# Altium PCB TwelfthManPCB.PcbDoc
Units mil, origin at the board's own origin, x right, y up, seen from the top; angles counter-clockwise.
Board outline 3200 x 2000 mil, 2 copper layers (Top Layer, Bottom Layer); 27 components, 17 nets, 118 pads, 38 vias.
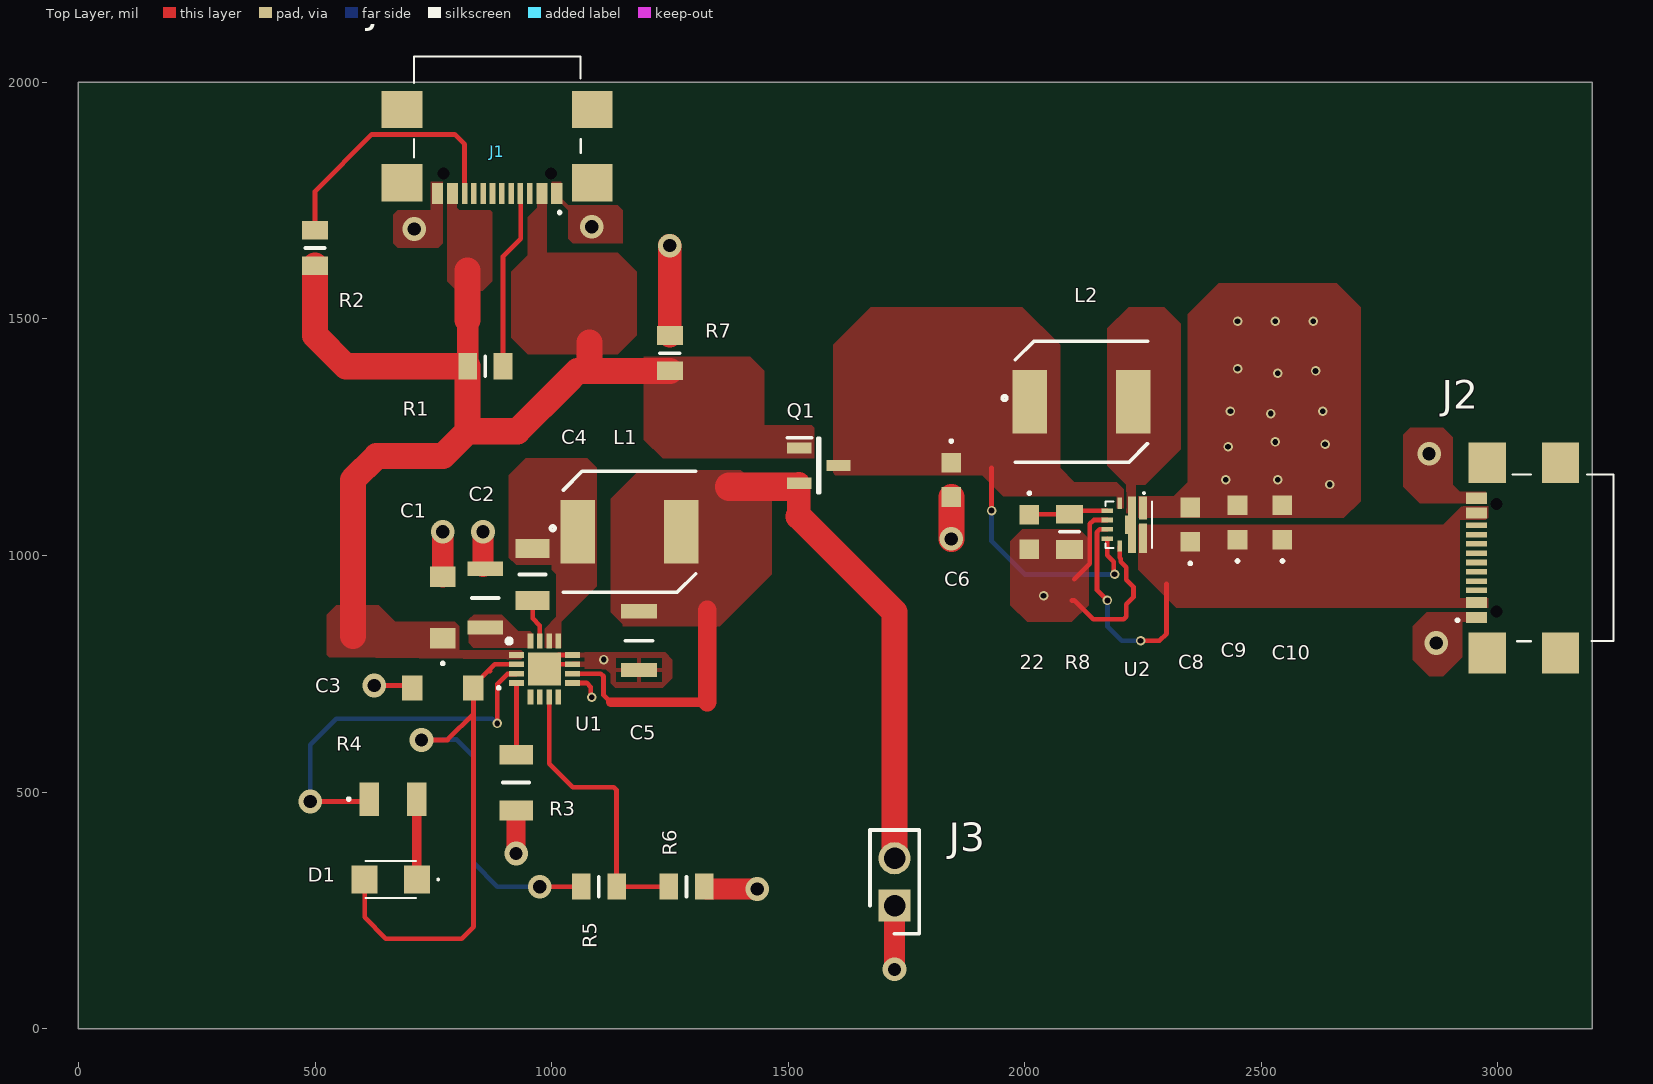
[diagram p0: Top Layer view]
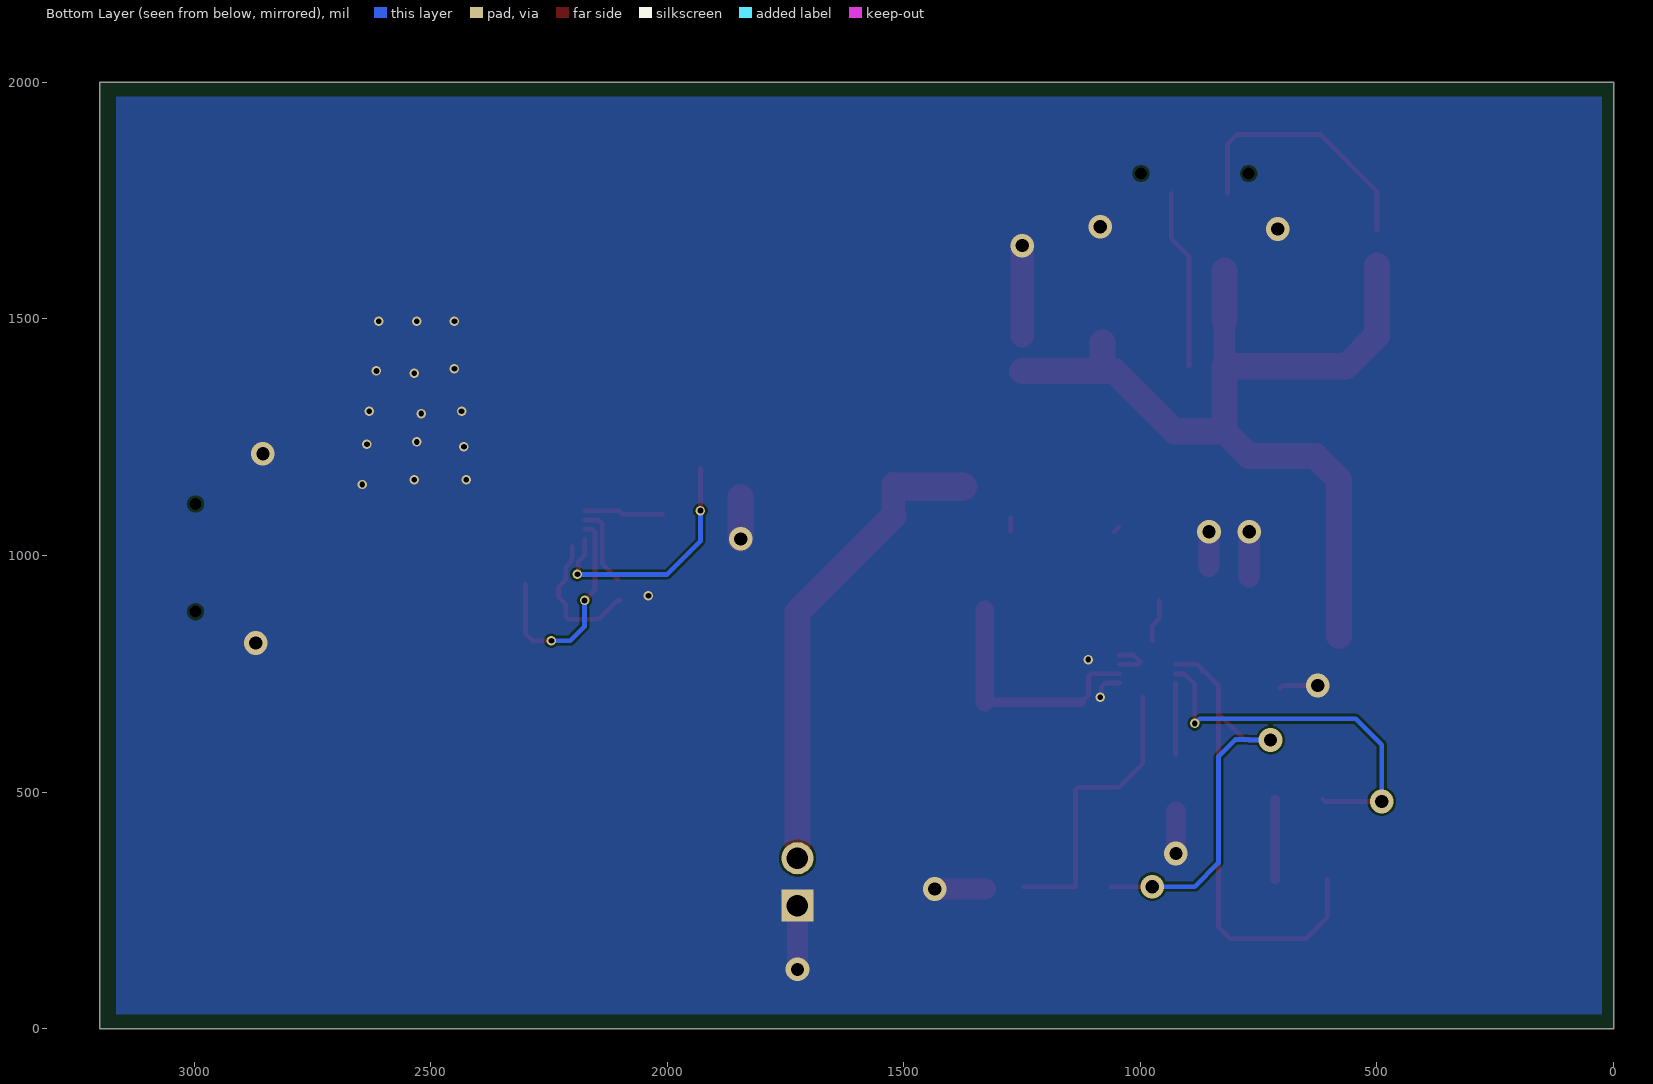
[diagram p1: Bottom Layer view, seen from below]
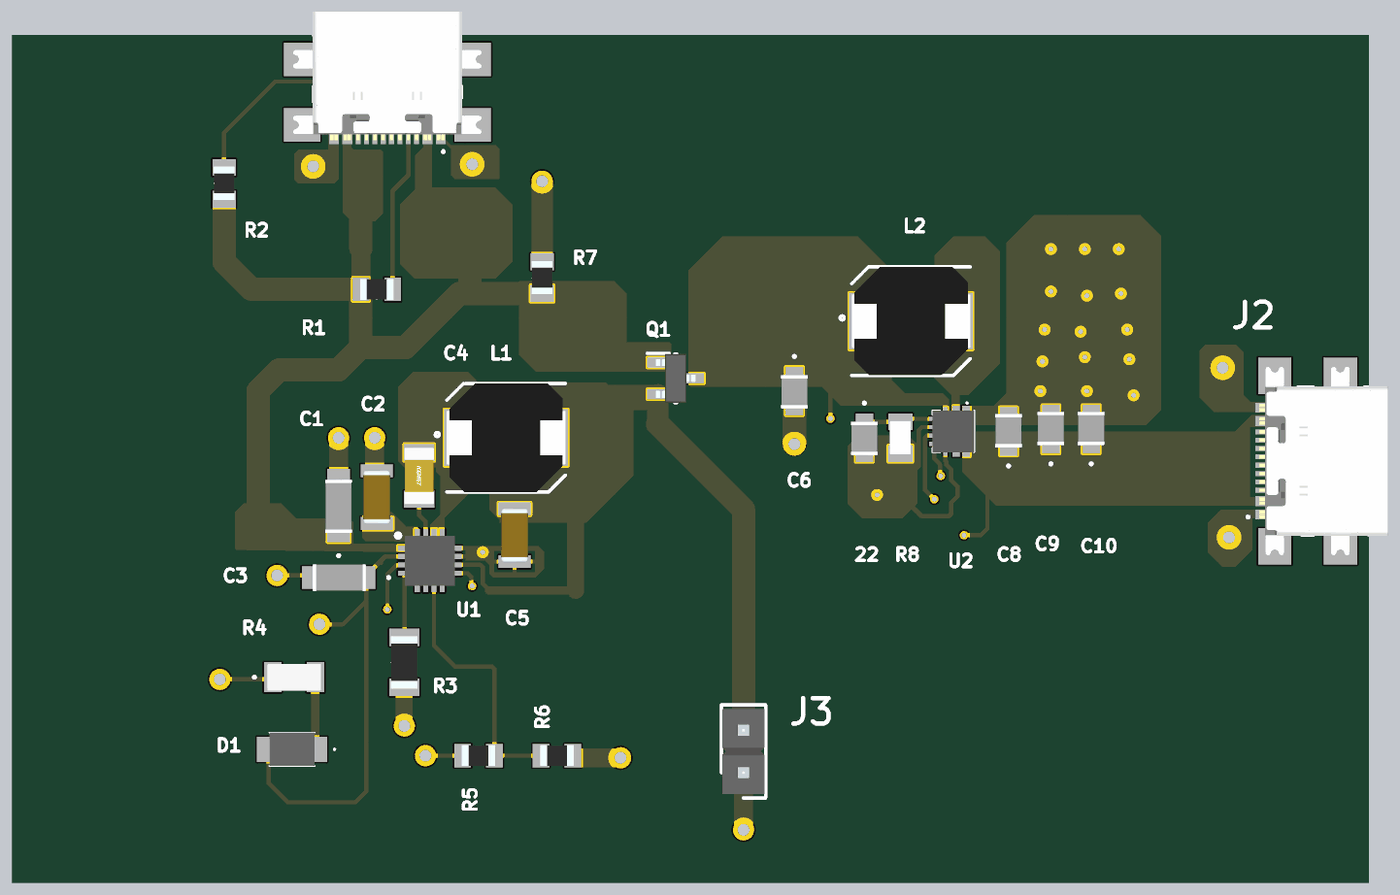
[diagram p2: 3D render of the assembled board from above, using the file's embedded part models]

## Layer stack, top to bottom
Top Solder: solder mask 0.4, Solder Resist, Dk 3.5
Top Layer: signal copper 1.4
Dielectric 1: dielectric 12.6, FR-4, Dk 4.8
Bottom Layer: signal copper 1.4
Bottom Solder: solder mask 0.4, Solder Resist, Dk 3.5

## Board outline
0,0 3200,0 3200,2000 0,2000

## Design rules (kind name [scope] priority, off if disabled: settings)
Clearance [All] p1: gap=5 ignorepadtopadclearanceinfootprint=TRUE
MinimumSolderMaskSliver [All] p1: minsoldermaskwidth=0.25
PolygonConnect [All] p1: connectstyle=Direct reliefconductorwidth=10 reliefentries=4 polygonreliefangle="90 Angle" airgapwidth=10
RoutingVias [All] p1: holewidth=12 width=20 viastyle="Through Hole" minholewidth=12 minwidth=20 maxholewidth=28 maxwidth=50
SilkToSilkClearance [All] p1: silktosilkclearance=1.97
SilkToSolderMaskClearance [IsPad] p1: minsilkscreentomaskgap=2.54 clearancetoexposedcopper=TRUE
SolderMaskExpansion [All] p1: expansion=4 istentingtop=FALSE
Width [All] p1: maxlimit=60 minlimit=10 preferedwidth=10 minimp=50.000000 maximp=50.000000 favimp=50.000000
27 further rules are at their usual default settings.

## Components (designator, comment, footprint, x,y, rotation, side; value= is the part's Value field where it differs from the comment)
22 "10nF" C2012_Commercial 2010,1050 r270 top (schematic designator C7)
C1 "2.2uF" C3216_Commercial 770,890 r90 top
C2 "10uF" CAPC3216X190N 860,910 r90 top
C3 "2.2uF" C3216_Commercial 770,720 r180 top
C4 "47nF" CAPC3216X175N 960,960 r270 top
C5 "10uF" CAPC3216X190N 1185,820 r270 top
C6 "47uF" C2012_Commercial 1845,1160 r270 top
C8 "22uF" C2012_Commercial 2350,1065 r90 top
C9 "22uF" C2012_Commercial 2450,1070 r90 top
C10 "47uF" C2012_Commercial 2545,1070 r90 top
D1 "AA3021LSYSK_J3-TR" AA3021LSYSKJ3TR 660,315 r180 top
J1 "USB4110-GF-A" USB4110GFA 885,1910 r180 top
J2 "USB4110-GF-A" USB4110GFA 3100,995 r90 top
J3 "M20-9990246" HDRV2W66P0X254_1X2_508X254X874P 1725,260 r90 top
L1 "1uH" SPM6530 1165,1050 r0 top
L2 "1uH" SPM6530 2120,1325 r0 top
Q1 "SI2369DS-T1-BE3" SOT95P237X112-3N 1565,1190 r0 top
R1 "10kohm" RESC2012X60N 860,1400 r0 top
R2 "10kohm" RESC2012X60N 500,1650 r90 top
R3 "20k" RESC3216X65N 925,520 r270 top
R4 "1k" RCC1206_e3 665,485 r0 top
R5 "10kohm" RESC2012X60N 1100,300 r0 top
R6 "10kohm" RESC2012X60N 1285,300 r0 top
R7 "10kohm" RESC2012X60N 1250,1427.6 r90 top
R8 "41.2kohm" RESC2012X65N 2095,1050 r270 top
U1 "BQ25303JRTER" QFN50P300X300X80-17N-D 985,760 r0 top
U2 "TPS61235PRWLR" TPS61235PRWLT 2250.24,1100.43 r270 top

## Footprints (in the part's own frame and the unit in brackets; to place one, negate y for a bottom-side part, rotate by r counter-clockwise, add the part's x,y. Pads: shape width x height; smd on the part's side, far side on the other; paste and mask are expansions set on the pad)
AA3021LSYSKJ3TR [mm]
  rect 1.4x1.5 smd: 1(-1.4,0) 2(1.4,0)
  silkscreen extent -2.6,-1 1.35,1, body extent -1.35,-1 1.35,1, height 1.4
C2012_Commercial [mm]
  rect 1.05x1.05 smd: 1(-0.925,0) 2(0.925,0)
  silkscreen extent -2.12,-0.05 -2.03,0.05, body extent -0.96,-0.8 1.04,0.8, height 1.25
C3216_Commercial [mm]
  rect 1.1x1.35 smd: 1(-1.65,0) 2(1.65,0)
  silkscreen extent -3.05,-0.05 -2.95,0.05, body extent -1.65,-0.8 1.55,0.8, height 1.6
CAPC3216X175N [mm]
  rect 1.02x1.82 smd: 1(-1.4,0) 2(1.4,0)
  silkscreen extent 0,-0.7 0,0.7, body extent -1.7,-0.9 1.7,0.9, height 1.75
CAPC3216X190N [mm]
  rect 0.77x1.92 smd: 1(-1.58,0) 2(1.58,0)
  silkscreen extent 0,-0.72 0,0.72, body extent -1.63,-0.82 1.63,0.82, height 1.9
HDRV2W66P0X254_1X2_508X254X874P [mm]
  rect 1.725x1.725 hole 1.15: 1(0,0)
  round 1.725 hole 1.15: 2(2.54,0)
  silkscreen extent -1.52,-1.32 4.06,1.32, body extent -1.27,-1.27 3.81,1.27, height 8.74
QFN50P300X300X80-17N-D [mm]
  rect 0.8x0.3 smd: 1(-1.5,0.75) 2(-1.5,0.25) 3(-1.5,-0.25) 4(-1.5,-0.75) 9(1.5,-0.75) 10(1.5,-0.25) 11(1.5,0.25) 12(1.5,0.75)
  rect 0.3x0.8 smd: 5(-0.75,-1.5) 6(-0.25,-1.5) 7(0.25,-1.5) 8(0.75,-1.5) 13(0.75,1.5) 14(0.25,1.5) 15(-0.25,1.5) 16(-0.75,1.5)
  rect 1.76x1.76 smd: 17(0,0)
  silkscreen extent -2.02,1.38 -1.77,1.62, body extent -1.5,-1.5 1.5,1.5, height 0.8
RCC1206_e3 [mm]
  rect 1.05x1.8 smd: 1(-1.275,0) 2(1.275,0)
  silkscreen extent -2.42,-0.05 -2.32,0.05, body extent -1.6,-0.8 1.6,0.8, height 0.55
RESC2012X60N [mm]
  rect 1x1.4 smd: 1(-0.95,0) 2(0.95,0)
  silkscreen extent 0,-0.53 0,0.53, body extent -1,-0.63 1,0.63, height 0.6
RESC2012X65N [mm]
  rect 1x1.45 smd: 1(-0.95,0) 2(0.95,0)
  silkscreen extent 0,-0.53 0,0.53, body extent -1,-0.63 1,0.63, height 0.56
RESC3216X65N [mm]
  rect 1.05x1.8 smd: 1(-1.5,0) 2(1.5,0)
  silkscreen extent 0,-0.7 0,0.7, body extent -1.58,-0.8 1.58,0.8, height 0.65
SOT95P237X112-3N [mm]
  rect 1.3x0.6 smd: 1(-1.05,0.95) 2(-1.05,-0.95) 3(1.05,0)
  silkscreen extent -1.7,-1.46 0.05,1.5, body extent -1.18,-1.46 1.18,1.46, height 1.12
SPM6530 [mm]
  rect 1.85x3.4 smd: 1(-2.775,0) 2(2.775,0)
  silkscreen extent -4.25,-3.25 3.55,3.25, body extent -3.55,-3.25 3.55,3.25, height 3.15
TPS61235PRWLT [mm]
  rect 1.24x0.44 smd: 1(0,0)
  rect 3.04x0.44 smd: 2(0.9,-0.6)
  rect 0.6x0.25 smd: 3(-0.25,-1.245) 8(2.05,-1.245)
  rect 0.25x0.6 smd: 4(0.15,-1.92) 5(0.65,-1.92) 6(1.15,-1.92) 7(1.65,-1.92)
  rect 1.59x0.44 smd: 9(1.625,0)
  rect 0.975x0.15 smd: 10(0.9,-0.895)
  silkscreen extent -0.85,-2.02 2.15,0.48, body extent -0.35,-2.03 2.15,0.47, height 1
USB4110GFA [mm]
  rect 0.3x1.15 smd mask+0: A1(-3.35,3.678) A4(-2.55,3.678) A5(-1.25,3.678) A6(-0.25,3.678) A7(0.25,3.678) A8(1.25,3.678) A9(2.55,3.678) A12(3.35,3.678) B1(3.05,3.678) B4(2.25,3.678) B5(1.75,3.678) B6(0.75,3.678) B7(-0.75,3.678) B8(-1.75,3.678) B9(-2.25,3.678) B12(-3.05,3.678)
  round 0.325 hole 0.65 unplated: MH1(-2.89,2.603) MH2(2.89,2.603)
  rect 2.18x2 smd: MP1(-5.11,-0.827) MP2(5.11,-0.827) MP3(-5.11,3.103) MP4(5.11,3.103)
  silkscreen extent -4.5,-3.68 4.47,4.75, body extent -5.65,-3.68 5.65,4.02, height 3.26

## Part data
22: library part C2012X5R2E103K125AA, "Capacitor - C2012X5R2E103K125AA", Manufacturer_Name=TDK, Mouser Part Number=810-C2012X5R2E103K1A, Arrow Part Number=C2012X5R2E103K125AA, Arrow Price/Stock=https://www.arrow.com/en/products/c2012x5r2e103k125aa/tdk?region=nac, Datasheet Link=https://product.tdk.com/system/files/dam/doc/product/capacitor/ceramic/mlcc/catalog/mlcc_commercial_midvoltage_en.pdf, Height=0.75mm, Manufacturer_Part_Number=C2012X5R2E103K125AA, Mouser Price/Stock=https://www.mouser.com/Search/Refine.aspx?Keyword=810-C2012X5R2E103K1A
C1 C3: library part C3216X7R1V225K160AE, "Capacitor - C3216X7R1V225K160AE", Manufacturer_Name=TDK, Mouser Part Number=810-C3216X7R1V225KAE, Datasheet Link=https://product.tdk.com/system/files/dam/doc/product/capacitor/ceramic/mlcc/catalog/mlcc_commercial_soft_en.pdf, Height=0.75mm, Manufacturer_Part_Number=C3216X7R1V225K160AE, Mouser Price/Stock=https://www.mouser.co.uk/ProductDetail/TDK/C3216X7R1V225K160AE?qs=nQSIdc08i%252Bcchfc%2FLB33PA%3D%3D
C2 C5: library part CNA5L1X7R1E106K160AE, "Capacitor - CNA5L1X7R1E106K160AE", Manufacturer_Name=TDK, Mouser Part Number=810-CNA5LX7R1E106K16, Arrow Part Number=CNA5L1X7R1E106K160AE, Arrow Price/Stock=https://www.arrow.com/en/products/cna5l1x7r1e106k160ae/tdk?region=nac, Datasheet Link=https://product.tdk.com/system/files/dam/doc/product/capacitor/ceramic/mlcc/catalog/mlcc_automotive_soft_cna_en.pdf, Height=1.9mm, Manufacturer_Part_Number=CNA5L1X7R1E106K160AE, Mouser Price/Stock=https://www.mouser.co.uk/ProductDetail/TDK/CNA5L1X7R1E106K160AE?qs=81r%252BiQLm7BR08r%2Fq9dBc7Q%3D%3D
C4: library part C1206C561KDGACAUTO, "Capacitor - C1206C561KDGACAUTO", Manufacturer_Name=KEMET, Mouser Part Number=80-C1206C561KDGAUTO, Datasheet Link=https://www.kemet.com/specsheet/C1206C561KDGACAUTO, Height=1.75mm, Manufacturer_Part_Number=C1206C561KDGACAUTO, Mouser Price/Stock=https://www.mouser.co.uk/ProductDetail/KEMET/C1206C561KDGACAUTO?qs=MyNHzdoqoQL%252BgGDPneTOTA%3D%3D
C6 C10: library part C2012X5R1A476M125AC, "Capacitor - C2012X5R1A476M125AC", Manufacturer_Name=TDK, Mouser Part Number=810-C2012X5R1A476M, Arrow Part Number=C2012X5R1A476M125AC, Arrow Price/Stock=https://www.arrow.com/en/products/c2012x5r1a476m125ac/tdk?region=nac, Datasheet Link=https://product.tdk.com/system/files/dam/doc/product/capacitor/ceramic/mlcc/catalog/mlcc_commercial_general_en.pdf, Height=0.75mm, Manufacturer_Part_Number=C2012X5R1A476M125AC, Mouser Price/Stock=https://www.mouser.co.uk/ProductDetail/TDK/C2012X5R1A476M125AC?qs=LcTL%2F5vFEzGyFw5hxP%2FMXw%3D%3D
C8 C9: library part C2012X5R1A226M125AB, "Capacitor - C2012X5R1A226M125AB", Manufacturer_Name=TDK, Mouser Part Number=810-C2012X5R1A226M-3, Arrow Part Number=C2012X5R1A226M125AB, Arrow Price/Stock=https://www.arrow.com/en/products/c2012x5r1a226m125ab/tdk?region=nac, Datasheet Link=https://product.tdk.com/system/files/dam/doc/product/capacitor/ceramic/mlcc/catalog/mlcc_commercial_general_en.pdf, Height=0.75mm, Manufacturer_Part_Number=C2012X5R1A226M125AB, Mouser Price/Stock=https://www.mouser.co.uk/ProductDetail/TDK/C2012X5R1A226M125AB?qs=LcTL%2F5vFEzEl81ah%2FUQuuw%3D%3D
D1: "LED-AA3021LSYSK_J3-TR", Manufacturer_Name=Kingbright, Manufacturer_Part_Number=AA3021LSYSK/J3-TR, Mouser Part Number=604-AA3021LSYSK/J3TR, Datasheet Link=https://eagle.componentsearchengine.com/Datasheets/1/AA3021LSYSK_J3-TR.pdf, Height=1.3mm, Mouser Price/Stock=https://www.mouser.co.uk/ProductDetail/Kingbright/AA3021LSYSK-J3-TR?qs=Oo40KB9lBTmS1V8p5PSO3Q%3D%3D
J1 J2: "Connector", Manufacturer_Name="GCT (GLOBAL CONNECTOR TECHNOLOGY)", Mouser Part Number=640-USB4110-GF-A, Datasheet Link=https://gct.co/files/drawings/usb4110.pdf, Height=3.26mm, Manufacturer_Part_Number=USB4110-GF-A, Mouser Price/Stock=https://www.mouser.co.uk/ProductDetail/GCT/USB4110-GF-A?qs=KUoIvG%2F9IlYiZvIXQjyJeA%3D%3D
J3: "Connector", Manufacturer_Name=Harwin, Mouser Part Number=855-M20-9990246, Datasheet Link=https://cdn.harwin.com/pdfs/M20-999.pdf, Height=8.74mm, Manufacturer_Part_Number=M20-9990246, Mouser Price/Stock=https://www.mouser.co.uk/ProductDetail/Harwin/M20-9990246?qs=Jph8NoUxIfWjw4WmyRvzag%3D%3D
L1 L2: library part SPM6530T-1R0M120, "Inductor (FeSi Core) - SPM6530T-1R0M120", Manufacturer_Name=TDK, Mouser Part Number=810-SPM6530T-1R0M120, Arrow Part Number=SPM6530T-1R0M120, Arrow Price/Stock=https://www.arrow.com/en/products/spm6530t-1r0m120/tdk?region=nac, Datasheet Link=https://product.tdk.com/system/files/dam/doc/product/inductor/inductor/smd/catalog/inductor_commercial_power_spm6530_en.pdf, Manufacturer_Part_Number=SPM6530T-1R0M120, Mouser Price/Stock=https://www.mouser.co.uk/ProductDetail/TDK/SPM6530T-1R0M120?qs=chjFIDm9dbpAC3nWIRa%252B5A%3D%3D
Q1: "MOSFET (P-Channel)", Manufacturer_Name=Vishay, Mouser Part Number=78-SI2369DS-T1-BE3, Arrow Part Number=SI2369DS-T1-BE3, Arrow Price/Stock=https://www.arrow.com/en/products/si2369ds-t1-be3/vishay?region=nac, Datasheet Link=https://www.mouser.com/datasheet/2/427/si2369d-1764360.pdf, Height=1.12mm, Manufacturer_Part_Number=SI2369DS-T1-BE3, Mouser Price/Stock=https://www.mouser.co.uk/ProductDetail/Vishay-Siliconix/SI2369DS-T1-BE3?qs=CiayqK2gdcIOn%252BvoBWrtBg%3D%3D
R1 R2 R5 R6 R7: library part CHP0805-FX-1002ELF, "Resistor - CHP0805-FX-1002ELF", Manufacturer_Name=Bourns, Mouser Part Number=652-CHP0805FX1002ELF, Datasheet Link=https://ms.componentsearchengine.com/Datasheets/1/CHP0805-FX-1002ELF.pdf, Height=0.6mm, Manufacturer_Part_Number=CHP0805-FX-1002ELF, Mouser Price/Stock=https://www.mouser.co.uk/ProductDetail/Bourns/CHP0805-FX-1002ELF?qs=lc2O%252BfHJPVaDI6gsPdDtfw%3D%3D
R3: library part RCS120620K0FKEA, "Resistor - RCS120620K0FKEA", Manufacturer_Name=Vishay, Mouser Part Number=71-RCS120620K0FKEA, Datasheet Link=https://componentsearchengine.com/Datasheets/1/RCS120620K0FKEA.pdf, Height=0.65mm, Manufacturer_Part_Number=RCS120620K0FKEA, Mouser Price/Stock=https://www.mouser.com/Search/Refine.aspx?Keyword=71-RCS120620K0FKEA
R4: library part RCC12061K00FKEA, "Resistor - RCC12061K00FKEA", Manufacturer_Name=Vishay, Mouser Part Number=71-RCC12061K00FKEA, Arrow Part Number=RCC12061K00FKEA, Arrow Price/Stock=https://www.arrow.com/en/products/rcc12061k00fkea/vishay?region=nac, Datasheet Link=https://www.vishay.com/docs/20066/rcce3.pdf, Height=0.6mm, Manufacturer_Part_Number=RCC12061K00FKEA, Mouser Price/Stock=https://www.mouser.co.uk/ProductDetail/Vishay-Dale/RCC12061K00FKEA?qs=IS%252B4QmGtzzoI2b9zl4DztQ%3D%3D
R8: library part RN73C2A41K2BTDF, "Resistor - RN73C2A41K2BTDF", Manufacturer_Name="TE Connectivity", Mouser Part Number=279-RN73CA-41.2K, Datasheet Link=https://datasheet.datasheetarchive.com/originals/distributors/DKDS42/DSANUWW0051573.pdf, Height=0.65mm, Manufacturer_Part_Number=RN73C2A41K2BTDF, Mouser Price/Stock=https://www.mouser.co.uk/ProductDetail/TE-Connectivity-Holsworthy/RN73C2A41K2BTDF?qs=rthfhr2kfqyM2M8zdDsBjw%3D%3D
U1: "Integrated Circuit", Manufacturer_Name="Texas Instruments", Mouser Part Number=595-BQ25303JRTER, Arrow Part Number=BQ25303JRTER, Arrow Price/Stock=https://www.arrow.com/en/products/bq25303jrter/texas-instruments?region=nac, Datasheet Link=https://www.ti.com/lit/ds/symlink/bq25303j.pdf?ts=1614639374775&ref_url=https%253A%252F%252Fwww.ti.com%252Fpower-management%252Fbattery-management%252Fcharger-ics%252Fproducts.html, Height=0.8mm, Manufacturer_Part_Number=BQ25303JRTER, Mouser Price/Stock=https://www.mouser.co.uk/ProductDetail/Texas-Instruments/BQ25303JRTER?qs=DRkmTr78QARA1C7%2F12q3og%3D%3D
U2: "Integrated Circuit - TPS61235PRWLR", Manufacturer_Name="Texas Instruments", Mouser Part Number=595-TPS61235PRWLR, Arrow Part Number=TPS61235PRWLR, Arrow Price/Stock=https://www.arrow.com/en/products/tps61235prwlr/texas-instruments?region=nac, Datasheet Link=http://www.ti.com/lit/gpn/tps61235p, Manufacturer_Part_Number=TPS61235PRWLR, Mouser Price/Stock=https://www.mouser.co.uk/ProductDetail/Texas-Instruments/TPS61235PRWLR?qs=LuYMPh7GGMQeafv6Awbrsg%3D%3D

## Via types
v1: diameter 20, hole 12, Top Layer to Bottom Layer, 23 vias
v2: diameter 50, hole 28, Top Layer to Bottom Layer, 15 vias

## Nets (pads, with @x,y where several pads share a name; then routed paths per layer and width w, separated by ;. In a path a pad name is that pad's centre, name@x,y a point inside that pad or via, vN(x,y) a via of type N, cw(c..) or ccw(c..) an arc to the next point about the centre after c; other vN are vias at no path point)
5VIN: C1.1 J1.A4 J1.A9 J1.B4 J1.B9 Q1.1 R1.1 R2.1 R7.1 U1.1 | length 2009.6
  Top Layer w10: 820,1605 822.6,1602.4 ; 1025,1365 1027.5,1362.5 ; 1055.2,1390.2 1080,1415
  Top Layer w45: R1.1 822.6,1497.4
  Top Layer w55: R2.1 500,1465 565,1400 R1.1 822.6,1262.6 ; 580,830 580,1160 630,1210 770,1210 822.6,1262.6 ; 822.6,1497.4 822.6,1602.4 ; 1080,1415 1080,1450 ; R7.1 1080,1390.2 1055.2,1390.2 1027.5,1362.5 927.6,1262.6 822.6,1262.6
5VOUT: C8.1 C9.1 C10.1 J2.A4 J2.A9 J2.B4 J2.B9 U2.6 U2.9 | length 481.4
  Top Layer w10: U2.6 2158.69,1055.16 2152.83,1049.3 2152.83,927.17 v1(2175,905) ; v1(2245,820) 2285,820 2300,835 2300,940
  Bottom Layer w10: v1(2175,905) 2175,850 2205,820 v1(2245,820)
CC1_IN: J1.A5 R1.2 | length 385.2
  Top Layer w10: R1.2@894.53,1402.87 R1.2 897.4,1632.4 935,1670 935,1764.41 J1.A5
CC2_IN: J1.B5 R2.2 | length 560.8
  Top Layer w10: R2.2 500,1770 620,1890 795,1890 816.1,1868.9 J1.B5
GND: 22.2 C1.2 C2.2 C3.2 C5.2 C6.2 C8.2 C9.2 C10.2 J1.A1 J1.A12 J1.B1 J1.B12 J2.A1 J2.A12 J2.B1 J2.B12 J3.1 R3.2 R6.2 R7.2 R8.2 U1.9 U1.11 U1.12 U1.17 U2.1 U2.5 U2.8 | length 1502.7
  Top Layer w10: v2(625,725) 700.04,725 C3.2 ; U1.9 1074.53,730.47 1083.09,721.91 1083.09,701.91 v1(1085,700) ; U1.11 1004.69,769.84 999.76,774.76 1014.53,789.53 U1.12 ; R6.2 R6.2@1327.4,295 ; 2100,905 2105,905 2145,865 2209.14,865 2215,870.86 2215,896.89 2230,911.89 2230,933.96 2215,948.96 2215,975 2203.09,986.91 2203.09,993.13 2201.22,994.99 U2.8 ; 2105,950 2137.83,982.83 2137.83,1066.82 2145.86,1074.84 U2.5
  Top Layer w40: v2(925,370) R3.2
  Top Layer w45: C1.2 v2(770,1050) ; C2.2@855,977.2 v2(855,1050) ; R6.2@1327.4,295 v2(1435,295) ; v2(1725,125) J3.1
  Top Layer w50: R7.2 v2(1250,1655)
  Top Layer w55: v2(1845,1035) C6.2
  other v1: 1110,780 2040,915 2645,1150 2425,1160 2535,1160 2430,1230 2635,1235 2530,1240 2520,1300 2435,1305 2630,1305 2535,1385 2615,1390 2450,1395 2450,1495 2530,1495 2610,1495
  other v2: 2870,815 2855,1215 710,1690 1085,1695
NetC2_1: C2.1 U1.16
NetC4_1: C4.1 L1.1 U1.13 U1.14 | length 14.1
  Top Layer w10: L1.1@1045.75,1060 L1.1
NetC4_2: C4.2 U1.15 | length 93.4
  Top Layer w10: C4.2 960,866.93 975.16,851.77 U1.15 U1.15@974.25,819.96
NetC5_1: C5.1 J3.2 L1.2 Q1.2 U1.10 | length 1585.7
  Top Layer w10: U1.10 1104.14,750.16 1110,744.3 1110,705 1125,690 ; L1.2 L1.2@1274.25,1080.51 ; Q1.2@1516.06,1145 1522.5,1151.44 Q1.2
  Top Layer w20: 1125,690 1329.14,690
  Top Layer w40: 1329.14,690 1329.14,885
  Top Layer w50: 1522.5,1082.5 Q1.2@1522.5,1151.44
  Top Layer w55: 1522.5,1082.5 1725,880 J3.2
  Top Layer w60: 1375,1145 Q1.2@1516.06,1145
NetC6_1: C6.1 L2.1 Q1.3 U2.3 U2.7 | length 525.8
  Top Layer w10: v1(1930,1095) 1930,1185 ; U2.7 2174.65,1000.35 2188.09,986.91 2188.09,961.91 v1(2190,960)
  Bottom Layer w10: v1(1930,1095) 1930,1030 2000,960 v1(2190,960)
NetC7_1: 22.1 R8.1 U2.4 | length 168
  Top Layer w10: 22.1 2010.98,1087.4 R8.1 2102.13,1094.53 U2.4
NetD1_1: D1.1 R4.2 | length 170
  Top Layer w10: D1.1 D1.1@715.2,315.08
  Top Layer w20: D1.1@715.2,315.08 R4.2
NetL2_2: L2.2 U2.2
NetR3_1: R3.1 U1.4 | length 151.8
  Top Layer w10: R3.1 925.94,580 U1.4
NetR4_1: R4.1 U1.3 | length 802
  Top Layer w10: v2(490,480) 609.8,480 R4.1 ; v1(885,645) 885,728.15 906.1,749.25 925.04,749.25 U1.3
  Bottom Layer w10: v2(490,480) 490,600 545,655 874.14,655 884.14,645 v1(885,645)
NetR5_2: R5.2 R6.1 U1.7 | length 620.9
  Top Layer w10: U1.7 994.84,560.16 1045,510 1131.54,510 1137.4,504.14 R5.2 R6.1
REGN1: C3.1 D1.2 R5.1 U1.2 | length 1693.4
  Top Layer w10: D1.2 604.88,235.12 650,190 810,190 835,215 835,665 ; v2(725,610) 780,610 835,665 ; 870,755 867.52,757.48 ; U1.2 879.88,769.84 867.52,757.48 ; v2(975,300) R5.1 ; 835,665 C3.1 C3.1 834.96,724.92 867.52,757.48
  Bottom Layer w10: v2(725,610) 770.88,610 771.74,610.86 799.14,610.86 835,575 835,350 885,300 v2(975,300)
pads on no net: J1.A6 J1.A7 J1.A8 J1.B6 J1.B7 J1.B8 J1.MH1 J1.MH2 J1.MP1 J1.MP2 J1.MP3 J1.MP4 J2.A5 J2.A6 J2.A7 J2.A8 J2.B5 J2.B6 J2.B7 J2.B8 J2.MH1 J2.MH2 J2.MP1 J2.MP2 J2.MP3 J2.MP4 U1.5 U1.6 U1.8 U2.10

## Polygon pours and split planes (outlines as drawn)
GND on Top Layer "GND_L01_P076" (solid, pour order 76): 2975,880 2850,880 2820,850 2820,780 2855,745 2885,745 2925,785 2925,860 2975,860
GND on Top Layer "GND_L01_P074" (solid, pour order 74): 2835,1110 2800,1145 2800,1255 2815,1270 2885,1270 2905,1250 2905,1150 2920,1135 2975,1135 2975,1110 2975,1135 2975,1110
5VOUT on Top Layer "5VOUT_L01_P072" (solid, pour order 72): 2240,1065 2885,1065 2925,1105 2980,1105 2980,1080 2975,1075 2920,1075 2920,910 2980,910 2980,890 2320,890 2240,970
5VIN on Top Layer "5VIN_L01_P007" (solid, pour order 7): 1195,1420 1195,1245 1235,1205 1555,1205 1555,1270 1550,1275 1450,1275 1450,1390 1420,1420
GND on Top Layer "GND_L01_P034" (solid, pour order 34): 2240,1125 2240,1080 2675,1080 2710,1115 2710,1525 2660,1575 2410,1575 2345,1510 2345,1155 2315,1125
GND on Top Layer "GND_L01_P037" (solid, pour order 37): 1970,1030 1995,1055 2115,1055 2135,1035 2135,895 2100,860 2005,860 1970,895
GND on Top Layer "GND_L01_P040" (solid, pour order 40): 950,730 955,725 1015,725 1020,730 1020,760 1115,760 1125,750 1125,730 1135,720 1235,720 1255,740 1255,780 1240,795 960,795 950,785 950,775
NetC6_1 on Top Layer "NETC6_1_L01_P041" (solid, pour order 41): 1595,1445 1675,1525 1995,1525 2075,1445 2075,1185 2105,1155 2195,1155 2210,1140 2210,1100 2195,1100 2195,1125 1955,1125 1910,1170 1600,1170 1595,1175
NetL2_2 on Top Layer "NETL2_2_L01_P042" (solid, pour order 42): 2175,1480 2220,1525 2295,1525 2330,1490 2330,1225 2255,1150 2235,1150 2235,1040 2215,1040 2215,1150 2175,1190
NetC5_1 on Top Layer "NETC5_1_L01_P043" (solid, pour order 43): 1125,880 1150,855 1150,850 1355,850 1465,960 1465,1124.29 1400,1180 1185,1180 1125,1120
NetC4_1 on Top Layer "NETC4_1_L01_P055" (solid, pour order 55): 985,805 1020,805 1020,860 1095,935 1095,1185 1075,1205 945,1205 910,1170 910,995 925,980 1000,980 1000,970 1010,960 1010,870 985,845
5VIN on Top Layer "5VIN_L01_P057" (solid, pour order 57): 940,795 935,800 805,800 805,850 795,860 670,860 635,895 545,895 525,875 525,790 530,785 535,785 935,780 940,785
NetC2_1 on Top Layer "NETC2_1_L01_P058" (solid, pour order 58): 825,865 835,875 895,875 930,840 955,840 960,835 960,805 835,805 825,815
GND on Top Layer "GND_L01_P062" (solid, pour order 62): 745,1790 770,1790 770,1660 760,1650 675,1650 665,1660 665,1720 675,1730 745,1730
5VIN on Top Layer "5VIN_L01_P064" (solid, pour order 64): 970,1785 970,1735 950,1715 950,1635 915,1600 915,1460 950,1425 1140,1425 1180,1465 1180,1600 1140,1640 990,1640 990,1785
5VIN on Top Layer "5VIN_L01_P066" (solid, pour order 66): 780,1580 800,1560 855,1560 875,1580 875,1725 870,1730 805,1730 800,1735 800,1785 780,1785
GND on Top Layer "GND_L01_P067" (solid, pour order 67): 1000,1790 1000,1745 1020,1745 1035,1730 1035,1670 1045,1660 1150,1660 1150,1730 1140,1740 1035,1740 1020,1755 1020,1790
GND on Bottom Layer "GND_L02_P082" (solid, pour order 82): 30,1970 25,1970 25,30 3165,30 3165,40 3165,1970 35,1970

## Silkscreen, mask and mechanical layers (free items; w line width, h text height)
Mechanical 1:
  lines w0: 0,0 0,2000 ; 0,0 3200,0 ; 0,0 0,2000 ; 0,0 3200,0 ; 0,2000 3200,2000 ; 0,2000 3200,2000 ; 3200,0 3200,2000 ; 3200,0 3200,2000